# Altium PCB Slave_ver1.PcbDoc
Units mil, origin at the board's own origin, x right, y up, seen from the top; angles counter-clockwise.
Board outline 6000 x 4000 mil, 2 copper layers (Top Layer, Bottom Layer); 37 components, 28 nets, 112 pads, 4 vias.
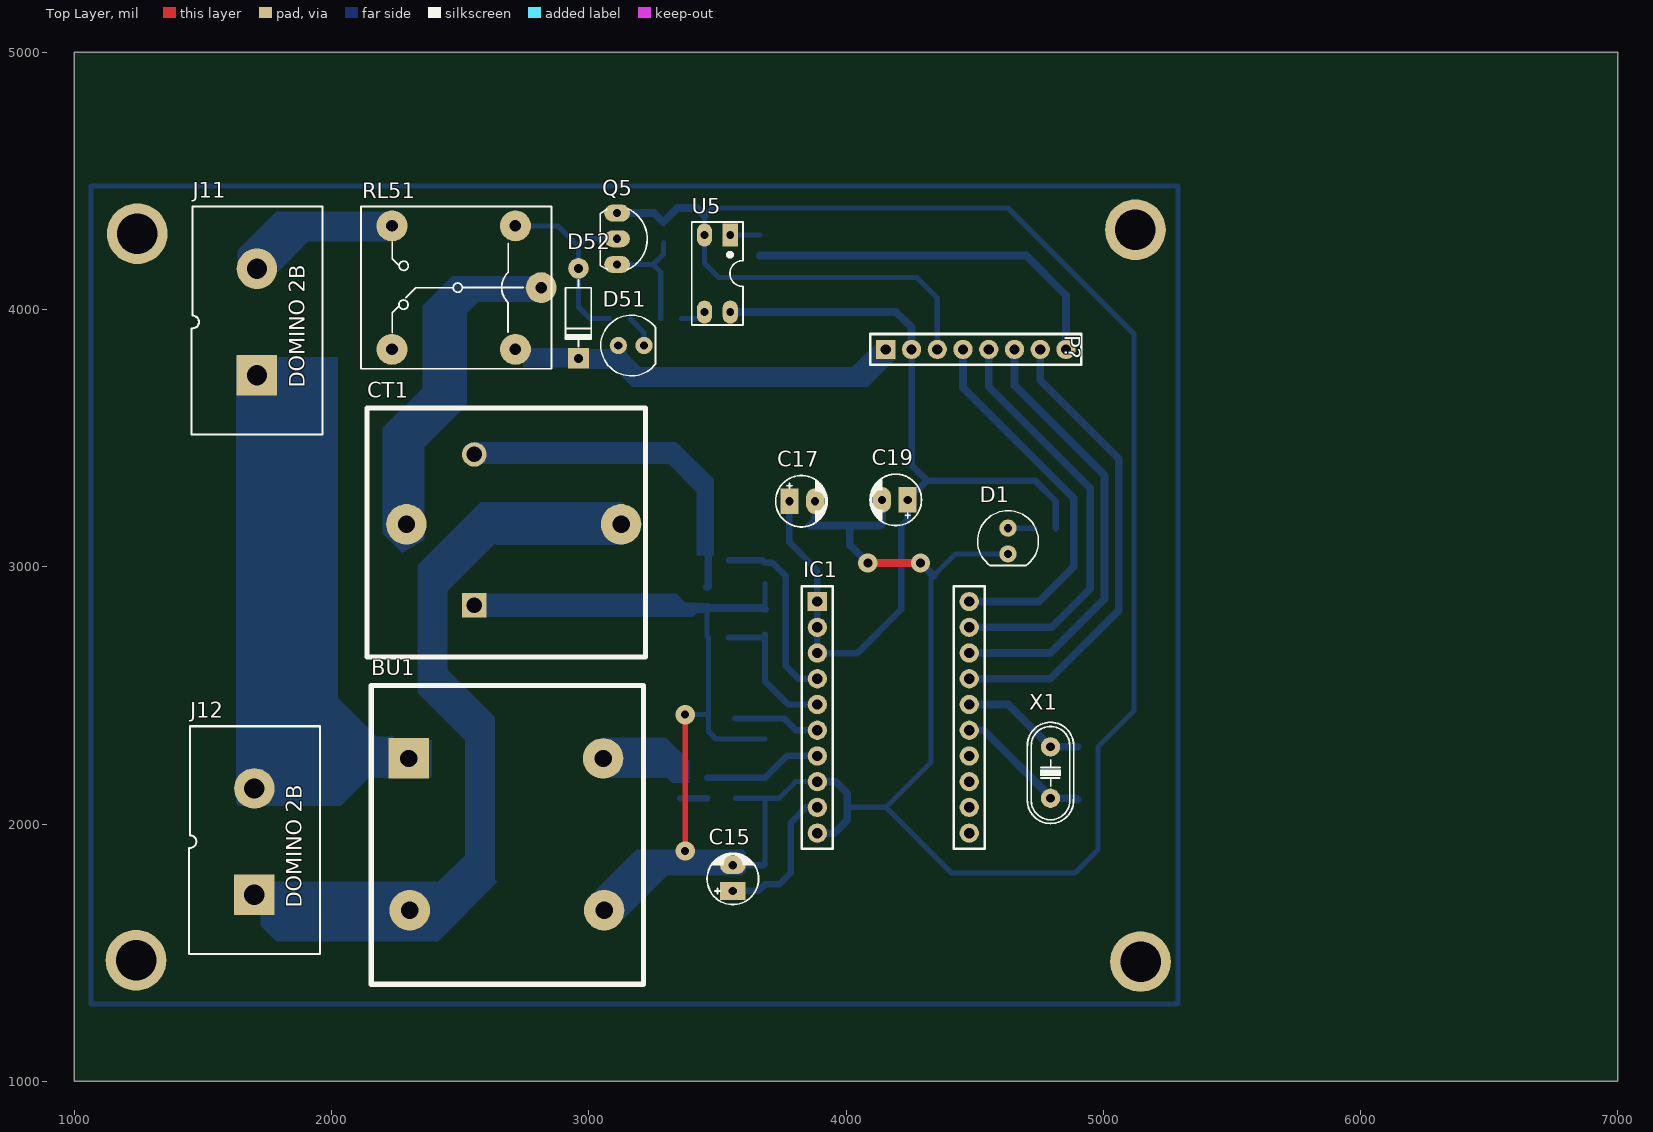
[diagram p0: Top Layer view]
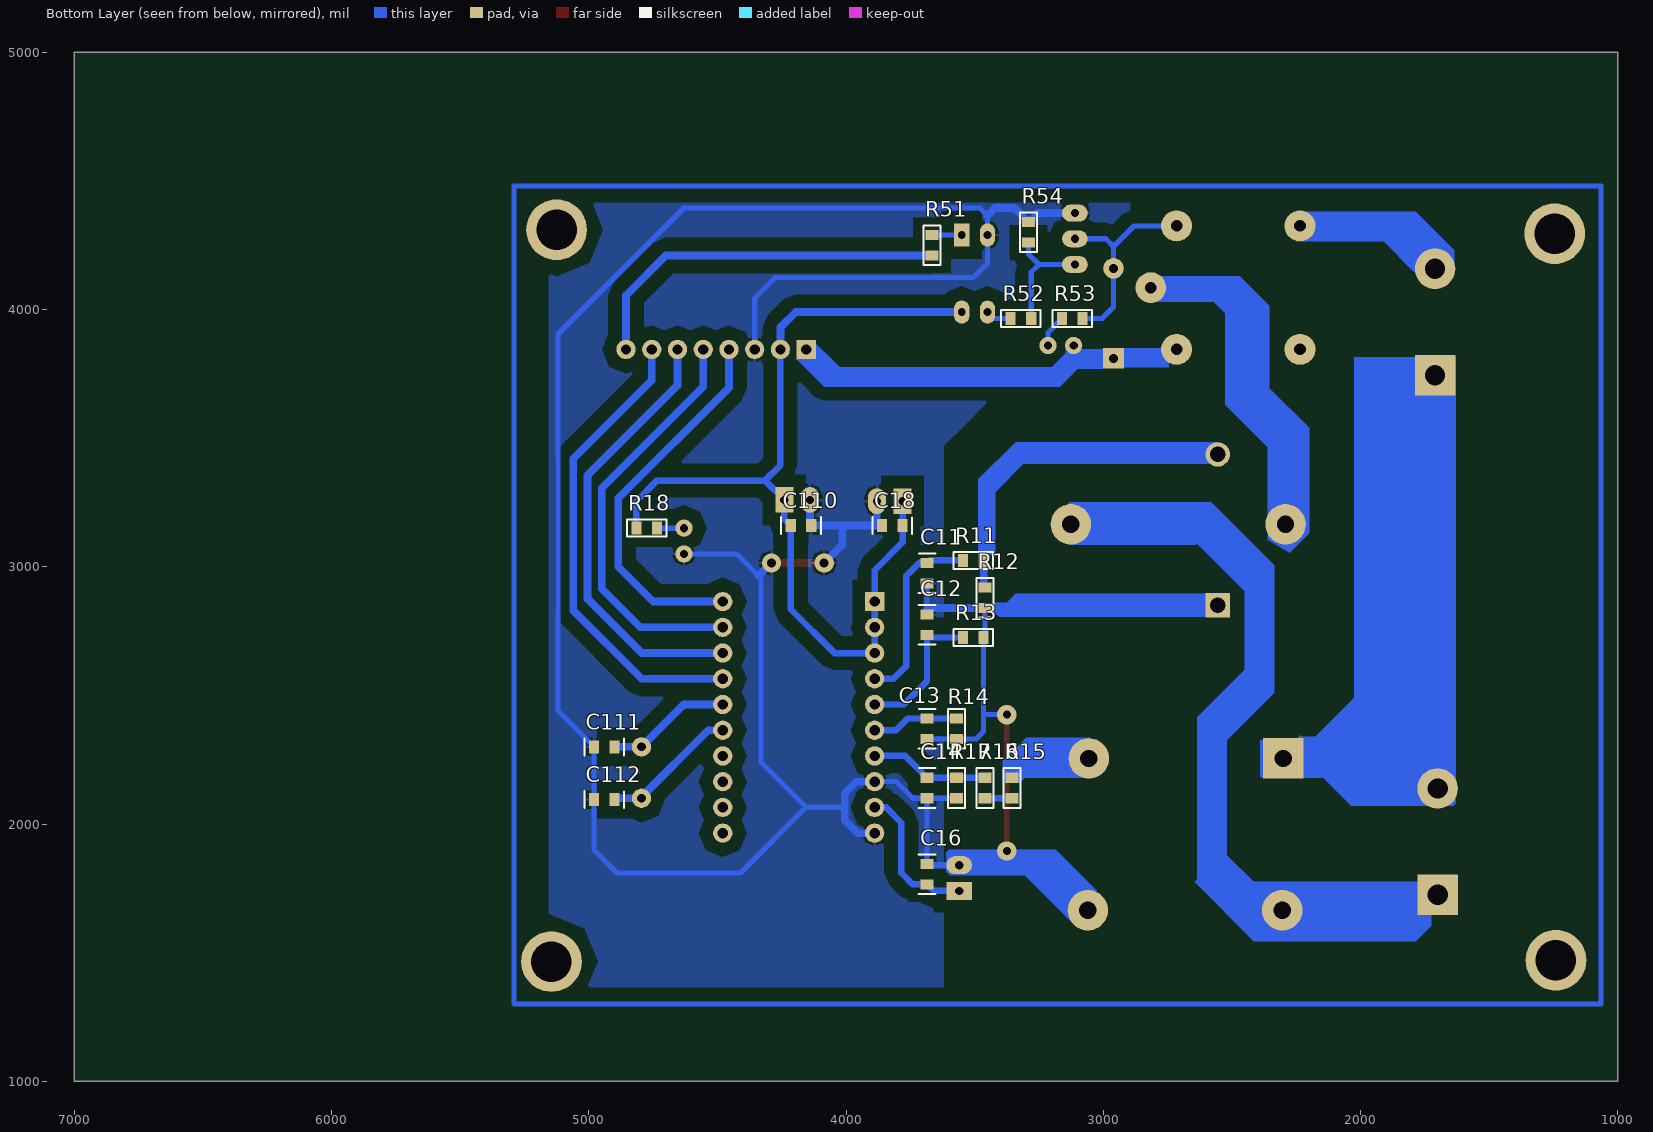
[diagram p1: Bottom Layer view, seen from below]

## Layer stack, top to bottom
Top Solder: solder mask 0.4, Solder Resist, Dk 3.5
Top Layer: signal copper 1.4
Dielectric 1: dielectric 12.6, FR-4, Dk 4.8
Bottom Layer: signal copper 1.4
Bottom Solder: solder mask 0.4, Solder Resist, Dk 3.5

## Board outline
1000,1000 7000,1000 7000,5000 1000,5000

## Design rules (kind name [scope] priority, off if disabled: settings)
Clearance [All] p1: gap=50
PolygonConnect [All] p1: connectstyle=Relief reliefconductorwidth=10 reliefentries=4 polygonreliefangle="90 Angle" airgapwidth=10
RoutingVias [All] p1: holewidth=28 width=50 viastyle="Through Hole" minholewidth=28 minwidth=50 maxholewidth=28 maxwidth=50
SolderMaskExpansion [All] p1: expansion=4
Width [All] p1: maxlimit=40 minlimit=10 preferedwidth=20
30 further rules are at their usual default settings.

## Components (designator, comment, footprint, x,y, rotation, side; value= is the part's Value field where it differs from the comment)
BU1 "Header 2x2" BU 2300,2255 r270 top
C11 "Capacitor Ceramic" CAP_SMD_0805 3685,2975 r90 bottom
C12 "Capacitor Ceramic" CAP_SMD_0805 3685,2775 r270 bottom
C13 "Capacitor Ceramic" CAP_SMD_0805 3685,2370 r90 bottom
C14 "Capacitor Ceramic" CAP_SMD_0805 3685,2140 r90 bottom
C15 "10uF" CP1/2 3560,1740 r90 top
C16 "Capacitor Ceramic" CAP_SMD_0805 3685,1805 r270 bottom
C17 "10uF" CP1/2 3780,3255 r0 top
C18 "Capacitor Ceramic" CAP_SMD_0805 3820,3160 r180 bottom
C19 "10uF" CP1/2 4240,3260 r180 top
C110 "Capacitor Ceramic" CAP_SMD_0805 4175,3160 r0 bottom
C111 "Capacitor Ceramic" CAP_SMD_0805 4940,2300 r180 bottom
C112 "Capacitor Ceramic" CAP_SMD_0805 4940,2095 r180 bottom
CT1 "2000:1" BI 2555,2850 r0 top
D1 "LED" "LED-0 5mm RED" 4630,3100 r0 top
D51 "LED" "LED-0 5mm RED" 3165,3860 r90 top
D52 "1N4007" D1A 2960,4160 r90 top
IC1 "ADE7753" ADE7753_Header 4180,2400 r0 top
J11 "CON.Domino2" "DOMINO 2B" 1710,3745 r90 top
J12 "CON.Domino2" "DOMINO 2B" 1700,1725 r90 top
P? "Header 8" "Header 8" 4155,3845 r0 top
Q5 "C1815" QTO-92 3110,4275 r270 top
R11 "RES_SMD_0805" "DIEN TRO 0805" 3505,3025 r180 bottom
R12 "RES_SMD_0805" "DIEN TRO 0805" 3460,2880 r90 bottom
R13 "RES_SMD_0805" "DIEN TRO 0805" 3505,2725 r180 bottom
R14 "RES_SMD_0805" "DIEN TRO 0805" 3570,2370 r90 bottom
R15 "RES_SMD_0805" "DIEN TRO 0805" 3355,2140 r90 bottom
R16 "RES_SMD_0805" "DIEN TRO 0805" 3460,2140 r270 bottom
R17 "RES_SMD_0805" "DIEN TRO 0805" 3570,2140 r90 bottom
R18 "RES_SMD_0805" "DIEN TRO 0805" 4775,3150 r0 bottom
R51 "RES_SMD_0805" "DIEN TRO 0805" 3665,4250 r270 bottom
R52 "RES_SMD_0805" "DIEN TRO 0805" 3320,3965 r0 bottom
R53 "RES_SMD_0805" "DIEN TRO 0805" 3120,3965 r180 bottom
R54 "RES_SMD_0805" "DIEN TRO 0805" 3290,4300 r90 bottom
RL51 "Relay 10A/12V" RL_SPDT_10A 2815,4085 r180 top
U5 "TLP521-1" DIP4/W0.3 3550,4290 r180 top
X1 "3.58Mhz" XT2 4795,2200 r90 top

## Footprints (in the part's own frame and the unit in brackets; to place one, negate y for a bottom-side part, rotate by r counter-clockwise, add the part's x,y. Pads: shape width x height; smd on the part's side, far side on the other; paste and mask are expansions set on the pad)
ADE7753_Header [mm] "Connector; Header; 10 Position; Solder Pad 35mil"
  rect 1.905x1.905 hole 1.016: 1(-7.4,11.8)
  round 1.905 hole 1.016: 2(-7.4,9.26) 3(-7.4,6.72) 4(-7.4,4.18) 5(-7.4,1.64) 6(-7.4,-0.9) 7(-7.4,-3.44) 8(-7.4,-5.98) 9(-7.4,-8.52) 10(-7.4,-11.06) 11(7.6,-11.06) 12(7.6,-8.52) 13(7.6,-5.98) 14(7.6,-3.44) 15(7.6,-0.9) 16(7.6,1.64) 17(7.6,4.18) 18(7.6,6.72) 19(7.6,9.26) 20(7.6,11.8)
  silkscreen extent -8.92,-12.58 9.12,13.32, body extent -8.67,-12.33 8.87,13.07, height 8.38
BI [mm] "Connector; Header; 6 Position; 2 Row; Solder Pad 35mil"
  round 4 hole 1.7: 1(-6.7,8) 3(14.5,8)
  round 2.413 hole 1.524: 2(0,14.9)
  rect 2.413x2.413 hole 1.524: 4(0,0)
  silkscreen extent -10.6,-5.1 16.9,19.5
BU [mm] "Connector; Header; 6 Position; 2 Row; Solder Pad 35mil"
  rect 4x4 hole 1.7: 1(0,0)
  round 4 hole 1.7: 2(0,19.2) 3(15,0.1) 4(15,19.3)
  silkscreen extent -7.2,-3.7 22.3,23.2
CAP_SMD_0805 [mil] "Chip Resistor; Body 2.0 x 1.3 mm (LxW typ)"
  rect 39.37x50 smd: 1(-40,0) 2(40,0)
  silkscreen extent -77,-33 77,33, body extent -39,-25 39,25, height 31
CP1/2 [mil] "Tu hoa < 22uF/16>50V"
  rect 70x100 hole 32: 1(0,0)
  oval 70x100 hole 32: 2(100,0)
  silkscreen extent -53,-100 146,100, body extent -49,-99 149,99, height 287
D1A [mil] "Diode 1A, W 100mil, L 350mil"
  round 80 hole 35: 1(0,0)
  rect 80x80 hole 35: 2(-350,0)
  silkscreen extent -305,-50 -45,50, body extent -386,-33 34,36, height 84
"DIEN TRO 0805" [mil] "Chip Resistor; Body 2.0 x 1.3 mm (LxW typ)"
  rect 39.37x50 smd: 1(-40,0) 2(40,0)
  silkscreen extent -77,-33 77,33, body extent -39,-25 39,25, height 31
DIP4/W0.3 [mil] "4 PIN, W 300mil, Pin to pin 100mil"
  rect 60x90 hole 31: 1(0,0)
  oval 60x90 hole 31: 2(100,0) 3(100,300) 4(0,300)
  silkscreen extent -50,-50 150,350, body extent -59,-10 159,305, height 170
"DOMINO 2B" [mm]
  rect 4x4 hole 2: 1(0,0)
  round 4 hole 2: 2(10.5,0)
  silkscreen extent -5.84,-6.48 16.64,6.48
"Header 8" [mil] "Connector; Header; 8 Position; Solder Pad 35mil"
  rect 75x75 hole 40: 1(0,0)
  round 75 hole 40: 2(100,0) 3(200,0) 4(300,0) 5(400,0) 6(500,0) 7(600,0) 8(700,0)
  silkscreen extent -60,-60 760,60, body extent -50,-50 750,50, height 330
"LED-0 5mm RED" [mil] "Typical LED; RED; 2 Leads; Solder Pad 35mil"
  round 67 hole 32: 1(0,50) 2(0,-50)
  silkscreen extent -118,-96 118,118, body extent -118,-96 119,117, height 345
QTO-92 [mil] "TO-92"
  oval 66x100 hole 32: 1(-100,0) 2(0,0) 3(100,0)
  silkscreen extent -117,-65 120,118, body extent -109,-66 109,95, height 245
RL_SPDT_10A [mil] "Relay SPDT, 5 pin, 10A,W 650mil, L 800mil, H 800mil"
  round 120 hole 45: 1(0,0) 2(580,240) 3(580,-240) 4(100,-240) 5(100,240)
  silkscreen extent -40,-315 700,315, body extent -46,-304 706,306, height 602
XT2 [mil] "Footpin for Crystal 2 pin"
  round 75 hole 34: 1(-100,0) 2(100,0)
  silkscreen extent -198,-90 195,90, body extent -233,-93 213,90, height 138

## Part data
BU1: "Header, 4-Pin, 2-Row"
C11 C12 C13 C14 C16 C18 C110 C111 C112: library part CapSMD, "Capacitor"
C15 C17 C19: library part CP1, "Cap P  0,1uF < 22uF , 16 - 50V"
CT1: library part "Header 2x2", "Header, 4-Pin, 2-Row"
D1 D51: "Typical LED"
D52: library part D1A, "Diode 1A"
IC1: "Single-Phase Multifunction Metering IC with di/dt Sensor Interface"
J11 J12: "2 pins Domino Header"
P?: "Header, 8-Pin"
Q5: "NPN 600mW, ECB"
R11 R12 R13 R14 R15 R16 R17 R18 R51 R52 R53 R54: "RES_0805"
RL51: library part "Relay 1", "Relay SPDT,10A - 12VDC 5 Pin"
U5: "Single Opto"
X1: library part XT2, "Crystal For all Crystal 2pin."

## Free pads (board coordinates)
  round 236.22 hole 157.48: 2(5125,4310) 3(5145,1465) 4(1245,4295) 5(1240,1470)

## Via types
v1: diameter 75, hole 35, Top Layer to Bottom Layer, 2 vias
v2: diameter 75, hole 31, Top Layer to Bottom Layer, 2 vias

## Nets (pads, with @x,y where several pads share a name; then routed paths per layer and width w, separated by ;. In a path a pad name is that pad's centre, name@x,y a point inside that pad or via, vN(x,y) a via of type N, cw(c..) or ccw(c..) an arc to the next point about the centre after c; other vN are vias at no path point)
12V: D51.1 D52.2 P?.1 RL51.5 | length 1570.8
  Bottom Layer w30: RL51.5 2745,3845 2780,3810 D52.2 3110,3810 ; D51.1 3115,3805 3175,3745 4055,3745 P?.1
A_GND: BU1.4 C11.1 C12.1 C13.1 C14.1 C15.2 C16.1 C17.2 C18.1 C19.2 C110.1 C111.1 C112.1 CT1.4 D1.2 IC1.8 IC1.10 P?.3 Q5.1 R12.1 R13.2 R14.1 R17.1 R54.2 U5.2 | length 13356.4
  Top Layer w20: v2(3375,1895) v2(3375,2425)
  Top Layer w30: v1(4085,3015) v1(4290,3015)
  Bottom Layer w20: 3375,1840 3392.5,1857.5 3375,1875 v2(3375,1895) ; v2(3375,2425) 3465,2425 ; R12.1 3460,2730 R13.2 3465,2425 ; R17.1 C14.1 ; C16.1 C14.1 ; C13.1 R14.1 3495,2330 3465,2360 3465,2425 ; 3685,2835 C11.1 ; IC1.8 3804.57,2164.57 3740,2100 C14.1 ; 4005,2065 4155,2065 ; P?.3@4355,3840 4355,4045 4275,4125 3505,4125 3450,4180 U5.2 3450,4365 3480,4395 4630,4395 5120,3905 5120,2440 C111.1 C112.1 4980,1900 4890,1810 4410,1810 4155,2065 ; D1.2 4425,3050 4340,2965 4330,2955 4330,2240 4155,2065
  Bottom Layer w25: CT1.4 CT1.4@2565,2840 ; BU1.4 3235.39,1840 3375,1840 C15.2 3680,1840 C16.1
  Bottom Layer w30: Q5.1 3255,4375 R54.2 3345,4395 3420,4395 3450,4365 ; R12.1 3680,2840 3685,2835 ; C17.2 3880,3180 C18.1 4015,3160 ; IC1.10 3954.57,1964.57 4005,2015 4005,2065 4005,2120 3960.43,2164.57 IC1.8 ; v1(4085,3015) 4015,3085 4015,3160 ; C19.2 4140,3165 C110.1 4015,3160 ; v1(4290,3015) 4340,2965
  Bottom Layer w40: CT1.4@2565,2840 R12.1
AVDD: C17.1 C18.2 C19.1 C110.2 IC1.1 IC1.2 IC1.3 P?.2 R18.2 U5.4 | length 3561.6
  Bottom Layer w25: C17.1 C18.2 3780,3095 3888.66,2986.34 IC1.1 IC1.2 IC1.3 4044.57,2664.57 4215,2835 C110.2 4240,3185 C19.1 4315,3335 ; P?.2@4255,3840 4255,3395 4315,3335 ; R18.2 4815,3255 4735,3335 4315,3335
  Bottom Layer w30: U5.4 4195,3990 4255,3930 P?.2@4255,3840
CLKIN: C112.2 IC1.15 X1.1 | length 535.4
  Bottom Layer w30: IC1.15 4535.43,2364.57 4795,2105 X1.1 4895,2100 C112.2
CLKOUT: C111.2 IC1.16 X1.2 | length 489
  Bottom Layer w30: IC1.16 4630.43,2464.57 X1.2 C111.2
CS: IC1.17 P?.7 | length 1827.1
  Bottom Layer w30: IC1.17 4794.57,2564.57 5060,2830 5060,3420 4755,3725 P?.7@4755,3840
DIN: IC1.20 P?.4 | length 1480
  Bottom Layer w30: P?.4@4455,3840 4455,3695.86 4885,3265.86 4885,3000 4749.57,2864.57 IC1.20
DOUT: IC1.19 P?.5 | length 1621.7
  Bottom Layer w30: IC1.19 4799.57,2764.57 4950,2915 4950,3305 4555,3700 P?.5@4555,3840
LINE1: J11.2 RL51.3 | length 623.9
  Bottom Layer w40: J11.2 1710,4213.39 1820,4323.39 RL51.3@2233.39,4323.39
LINE2: CT1.1 RL51.1
NetBU1_1: BU1.1 J11.1 J12.2
NetBU1_2: BU1.2 R15.2 | length 330.2
  Bottom Layer w30: BU1.2 3280,2255 R15.2
NetBU1_3: BU1.3 CT1.3 J12.1
NetCT1_2: CT1.2 R11.2 R12.2 | length 1345.7
  Bottom Layer w30: CT1.2 3323.39,3436.61 3465,3295 R11.2 3465,2925 R12.2
NetD1_1: D1.1 R18.1 | length 105
  Bottom Layer w20: D1.1 R18.1
NetD51_2: D51.2 R53.1 | length 127.8
  Bottom Layer w20: R53.1 3215,3910 D51.2
NetD52_1: D52.1 Q5.2 R53.2 RL51.4 | length 814.2
  Bottom Layer w20: RL51.4 2880,4325 2960,4245 ; R53.2 3005,3965 2960,4010 D52.1 2960,4245 ; Q5.2 2990,4275 2960,4245
NetQ5_3: Q5.3 R52.1 R54.1 | length 464
  Bottom Layer w20: Q5.3 3250,4175 ; R52.1 3280,4145 3250,4175 ; R54.1 3290,4215 3250,4175
NetR15_1: R15.1 R16.2 | length 105
  Bottom Layer w25: R15.1 R16.2
NetR51_1: R51.1 U5.1 | length 115
  Bottom Layer w20: U5.1 R51.1
NetR52_2: R52.2 U5.3 | length 100.4
  Bottom Layer w20: R52.2 3425,3965 U5.3
REF: C15.1 C16.2 IC1.9 | length 577.3
  Bottom Layer w25: C15.1 3660,1740 C16.2 3740,1765 3785,1810 3785,2005 3844.57,2064.57 IC1.9
RELAY: P?.8 R51.2 | length 1469.2
  Bottom Layer w30: R51.2 4700,4210 4855,4055 P?.8@4855,3840
SCLK: IC1.18 P?.6 | length 1722.9
  Bottom Layer w30: IC1.18 4794.57,2664.57 5005,2875 5005,3355 4655,3705 P?.6@4655,3840
V1N: C12.2 IC1.5 R13.1 | length 565.3
  Bottom Layer w25: R13.1 3675,2725 C12.2 3685,2555 3775.43,2464.57 IC1.5
V1P: C11.2 IC1.4 R11.1 | length 725.3
  Bottom Layer w25: R11.1 C11.2@3675,3025 ; C11.2 3715,3015 3765,2965 3765,2615 3815.43,2564.57 IC1.4
V2N: C13.2 IC1.6 R14.2 | length 337.5
  Bottom Layer w25: R14.2 C13.2 3760,2410 3805.43,2364.57 IC1.6
V2P: C14.2 IC1.7 R16.1 R17.2 | length 463.7
  Bottom Layer w25: R16.1 R17.2 C14.2 3769.57,2264.57 IC1.7
pads on no net: IC1.11 IC1.12 IC1.13 IC1.14 RL51.2
copper on no net: | length 14810
  Bottom Layer w20: 1065,1300 5290,1300 5290,4480 1415,4480 1065,4480 1065,1300

## Polygon pours and split planes (outlines as drawn)
A_GND on Bottom Layer "G2" (solid, remove dead copper, pour order 0): 2895,4430 2895,3750 2960,3685 2975,3670 3250,3670 3420,3670 3535,3555 3620,3470 3620,1350 5155,1350 5155,4430

## Other copper
Bottom Layer:
  region net A_GND: 2600,2895 3340,2895 3375,2860 3420,2860 3420,2820 3405,2805 2595,2805
  region net 12V: 2925,3850 2760,3850 2745,3835 2745,3775 2930,3775
  region net 12V: 4125,3875 4050,3800 4025,3775 3200,3775 3145,3830 3145,3845 3000,3845 3000,3770 3100,3770 3170,3700 4085,3700 4190,3805 4195,3805
  region net NetBU1_1: 1630,3815 1630,2080 1640,2070 2035,2070 2145,2180 2385,2180 2390,2185 2390,2325 2255,2325 2235,2345 2230,2340 2175,2340 2025,2490 2025,3815
  region net LINE2: 2790,4130 2470,4130 2355,4015 2355,3690 2350,3690 2200,3540 2200,3130 2275,3055 2360,3105 2360,3465 2525,3630 2525,3985 2570,4030 2810,4030
  region net NetBU1_3: 3135,3250 2580,3250 2335,3005 2335,2510 2520,2325 2520,1875 2515,1875 2415,1775 1775,1775 1725,1725 1725,1605 1785,1545 2415,1545 2645,1775 2635,1785 2635,2415 2450,2600 2450,2905 2635,3090 2640,3085 3130,3085
  region net NetCT1_2: 2555,3485 3340,3485 3485,3340 3485,3040 3480,3045 3420,3045 3420,3290 3310,3400 2555,3400
  region net NetBU1_2: 3050,2335 3300,2335 3390,2245 3390,2160 3325,2160 3305,2180 3055,2180
  region net A_GND: 3025,1740 3185,1900 3600,1900 3610,1890 3610,1815 3595,1800 3305,1800 3115,1610
  region net LINE1: 1790,4145 1910,4265 2250,4265 2250,4385 2245,4380 1785,4380 1635,4230 1635,4170

## Text inside footprints (layer, text, board x,y; h text height)
J11: Top Overlay "DOMINO 2B" at 1895,3695 h60 r90
J12: Top Overlay "DOMINO 2B" at 1885,1675 h60 r90